# EAGLE board 2021-02-22_16-12-15 (EAGLE 6.4)
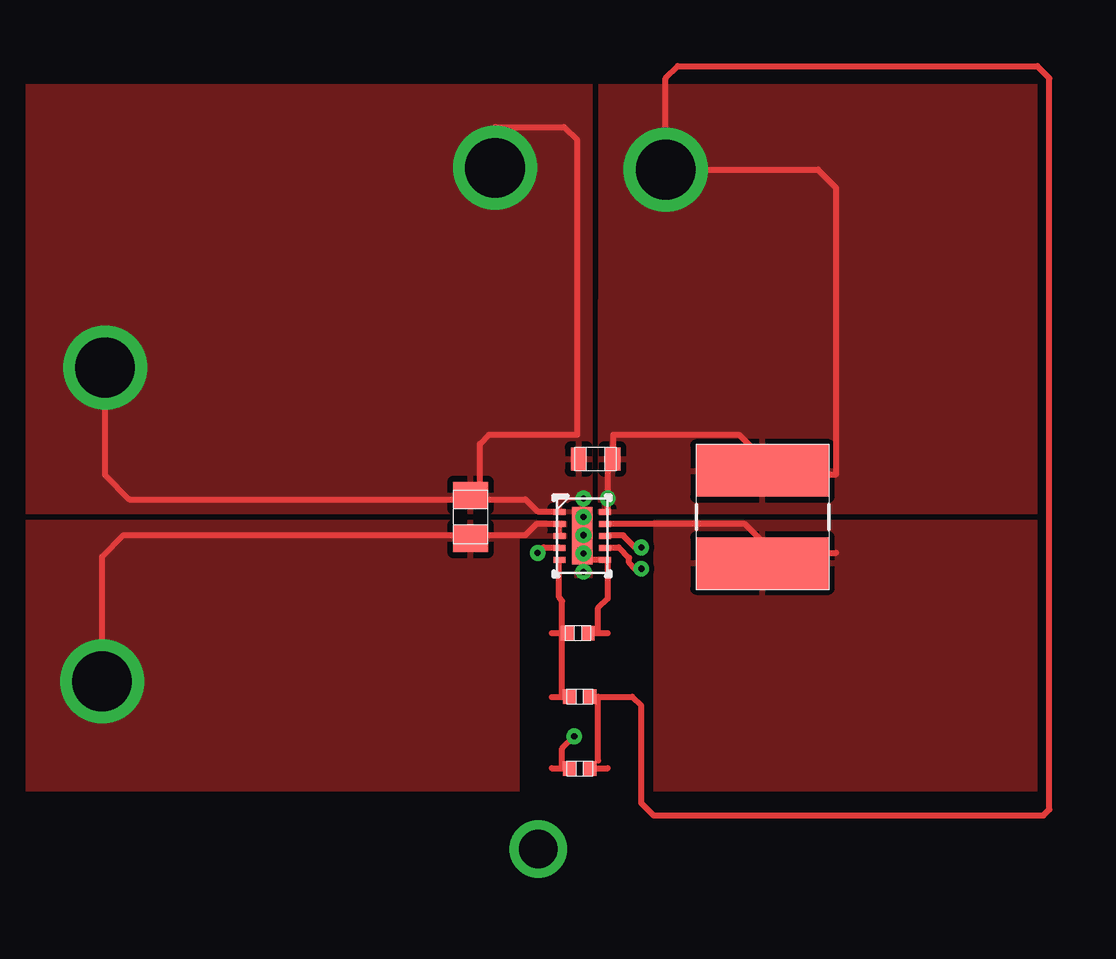
[diagram p0: board, top side]
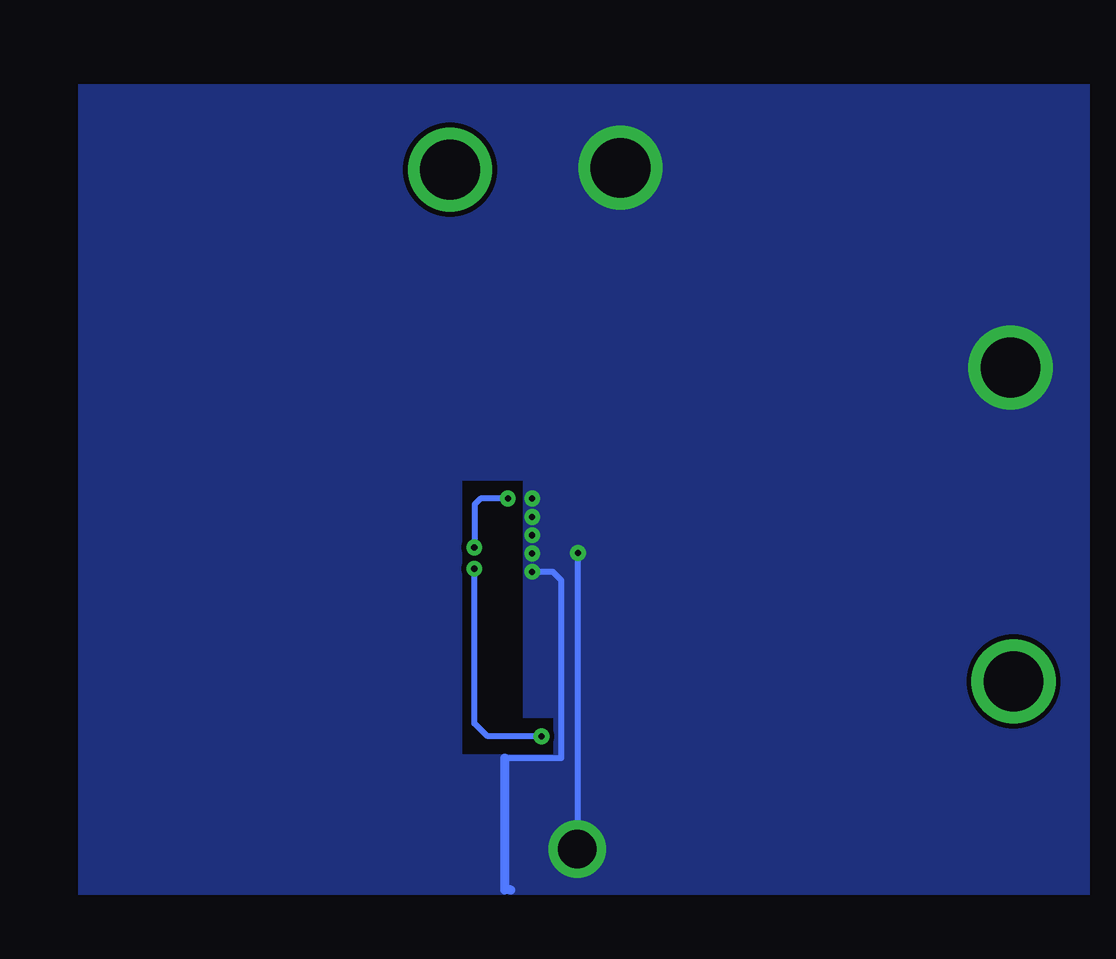
[diagram p1: board, bottom side, seen from below]

No outline drawn. Coordinates in mm, seen from the top.
Copper layers ((1*2)+(15*16)): TOP / INTERNAL1 / layer 15 / BOTTOM

## Footprints (pad centres in the part's own frame; a part is rotated, then mirrored left to right if it is on the bottom)
0805 = smd 1.118 x 1.448: 1 -0.902,0; 2 0.902,0
0603 = smd 0.66 x 0.965: 1 -0.699,0; 2 0.699,0
TP-1502 = drill 0.813 round: 1 0,0
IND_NPI54C = smd 2.146 x 5.512: 1 -1.924,0; 2 1.924,0
0402 = smd 0.559 x 0.61: 1 -0.419,0; 2 0.419,0
DQC0010A = smd 0.5 x 0.25: 1 -0.95,1; 2 -0.95,0.5; 3 -0.95,0; 4 -0.95,-0.5; 5 -0.95,-1; 6 0.95,-1; 7 0.95,-0.5; 8 0.95,0; 9 0.95,0.5; 10 0.95,1 | smd 0.84 x 2.4: 11 0,0

## Placement (x,y rotation side)
Cin  [0805]  45.72,43.69 90 top
Cout  [0603]  50.93,46.1 180 top
GND  [TP-1502]  30.43,49.89 0 top
GND1  [TP-1502]  46.74,58.22 0 top
L1  [IND_NPI54C]  57.89,43.69 90 top
Rfbb  [0402]  50.19,38.84 180 top
Rfbt  [0402]  50.27,36.2 180 top
Rpg  [0402]  50.27,33.2 180 top
TP_NC4  [TP-1502]  48.51,29.82 0 top
U1  [DQC0010A]  50.37,42.9 0 top
VIN  [TP-1502]  30.33,36.78 0 top
VOUT  [TP-1502]  53.85,58.12 0 top

## Library data of the parts
Cin = ultra-librarian; RefDes: Cin; Type: GRM21BR71E225KA73L
Cout = ultra-librarian; RefDes: Cout; Type: C1608X5R1A226M080AC
GND = ultra-librarian; RefDes: GND; Type: TP-1502
GND1 = ultra-librarian; RefDes: GND1; Type: TP-1502
L1 = ultra-librarian; RefDes: L1; Type: NPI54C100MTRF
Rfbb = ultra-librarian; RefDes: Rfbb; Type: CRCW0402383KFKED
Rfbt = ultra-librarian; RefDes: Rfbt; Type: CRCW04022M00FKED
Rpg = ultra-librarian; RefDes: Rpg; Type: CRCW0402100KFKED
TP_NC4 = ultra-librarian; RefDes: TP_NC4; Type: TP-1502
U1 = ultra-librarian; RefDes: U1; Type: TPS62175DQCR
VIN = ultra-librarian; RefDes: VIN; Type: TP-1502
VOUT = ultra-librarian; RefDes: VOUT; Type: TP-1502

## Nets
0: Cin.2 Cout.2 GND1.1 GND.1 Rfbb.1 TP_NC4.1 U1.1 U1.4 U1.6 U1.11
1: Rpg.2 U1.7
2: Cout.1 L1.2 Rfbt.1 Rpg.1 U1.8 U1.10 VOUT.1
3: L1.1 U1.9
4: Rfbb.2 Rfbt.2 U1.5
5: Cin.1 U1.2 U1.3 VIN.1

## Tracks (layer width: path | path; a pad name or v marks a point on that pad's centre or on a via)
0  (via drill 0.25 pad 0.56, 1.6 pad 2.21, 2.49 pad 3.48)
  TOP 0.254: 46.74,59.94 49.61,59.94 50.16,59.38 50.16,47.12 46.48,47.12 46.1,46.74 46.1,44.42 | v50.42,42.16 50.65,41.91 51.44,41.91 51.44,40.28 51.03,39.9 51.03,38.86 | 46.1,44.42 31.5,44.42 30.48,45.44 v30.48,49.91 | 46.1,44.42 | 46.1,44.42 | 46.1,44.42 48.01,44.42 48.51,43.92 49.4,43.92 | 49.4,42.42 48.77,42.42 v48.51,42.19 | 50.6,38.85 51.44,38.85
  BOTTOM 0.254: 51.56,33.63 49.2,33.63 49.2,41.05 49.55,41.4 v50.42,41.4 | 48.51,29.84 v48.51,42.19
  BOTTOM 0.381: 51.56,33.63 51.56,28.14 51.31,28.14
  other vias: 50.42,42.93 50.42,44.45 50.42,43.69 46.74,58.24 48.54,29.84
  pour TOP (rank 4): 27.18,43.81 27.18,61.72 50.8,61.72 50.8,41.15 50.04,41.15 50.04,43.81
  pour BOTTOM (rank 5): 27.18,61.72 69.34,61.72 69.34,27.94 51.56,27.94 51.56,33.78 53.34,33.78 53.34,45.21 50.8,45.21 50.8,35.31 49.53,35.31 49.53,33.78 51.44,33.78 51.44,27.91 27.18,27.94
1  (via drill 0.25 pad 0.56)
  TOP 0.254: v52.83,41.53 52.58,41.53 52.32,41.78 52.32,41.99 51.89,42.42 51.44,42.42 | 49.53,33.22 | 49.53,33.22 49.53,34.04 v50.04,34.54 | 49.1,33.21 49.94,33.21
  BOTTOM 0.254: v50.04,34.54 52.27,34.54 52.83,35.08 v52.83,41.53
2  (via drill 0.25 pad 0.56, 2.49 pad 3.48)
  TOP 0.254: 51.03,33.53 51.03,36.2 52.45,36.2 52.83,35.81 52.83,31.75 53.34,31.24 69.6,31.24 69.85,31.5 69.85,61.98 69.34,62.48 54.36,62.48 53.85,61.98 v53.85,58.17 60.2,58.17 60.96,57.4 60.96,45.47 58.55,45.47 56.9,47.12 51.66,47.12 51.66,46 51.44,45.74 v51.44,44.45 51.44,43.92 | v52.83,42.42 52.58,42.42 52.09,42.9 52.07,42.9 52.07,42.93 51.44,42.93 | 50.6,33.21 51.44,33.21 | 50.6,36.18 51.44,36.18
  BOTTOM 0.254: 52.81,42.42 52.81,44.22 52.58,44.45 v51.44,44.45
  pour TOP: 51.05,61.72 69.34,61.72 69.34,43.81 51.03,43.81
3
  TOP 0.254: 51.44,43.41 57.12,43.41 58.37,42.19 60.96,42.19
  pour TOP (rank 2): 53.34,43.56 53.34,32.26 69.34,32.26 69.34,43.56
4
  TOP 0.254: 49.4,41.91 49.4,40.34 49.53,40.18 49.53,38.86 49.53,36.2 | 49.53,36.2 | 49.1,38.85 49.94,38.85 | 49.1,36.18 49.94,36.18
5  (via drill 2.49 pad 3.48)
  TOP 0.254: 49.4,42.93 49.4,43.41 48.49,43.41 48.01,42.93 46.1,42.93 31.24,42.93 30.35,42.04 v30.35,36.83
  pour TOP (rank 3): 27.18,43.56 27.18,32.26 47.75,32.26 47.75,42.8 49.78,42.8 49.78,43.56